# EAGLE board Iluminacion_LED (EAGLE 9.6.0)

Size 114.5 x 114.5 mm. Coordinates in mm from the lower left corner, seen from the top.
Outline: circle at 57.25,57.25 radius 50.25
Outline: circle at 57.25,57.25 radius 57.25
Copper layers (1*16): Top 0.035mm / dielectric 1.5mm / Bottom 0.035mm
Design rules "default": minimum track width 6mil, minimum drill 0.35mm, track to track 6mil, track to pad 6mil, pad to pad 6mil, via to via 6mil, smd to smd 6mil, copper to edge 40mil, drill to drill 6mil, minimum pad ring 10mil, minimum via ring 8mil, stop-mask expansion 4mil, vias tented up to drill 0mil, thermal gap 10mil

## Footprints (pad centres in the part's own frame; a part is rotated, then mirrored left to right if it is on the bottom)
LED5730-BLANCO = smd 2.3 x 1.8: 3 0,0 | smd 1.2 x 1.8: A -2.5,0; C 2.5,0
R0805 = smd 1.3 x 1.5: 1 -0.95,0; 2 0.95,0

## Placement (x,y rotation side)
LED1  [LED5730-BLANCO]  111,56.75 0 top
LED2  [LED5730-BLANCO]  110.18,66.08 10 top
LED3  [LED5730-BLANCO]  107.76,75.13 20 top
LED4  [LED5730-BLANCO]  103.8,83.62 30 top
LED5  [LED5730-BLANCO]  98.42,91.3 40 top
LED6  [LED5730-BLANCO]  91.8,97.92 50 top
LED7  [LED5730-BLANCO]  84.12,103.3 60 top
LED8  [LED5730-BLANCO]  75.63,107.26 70 top
LED9  [LED5730-BLANCO]  66.58,109.68 80 top
LED10  [LED5730-BLANCO]  20.42,65.64 0 top
LED11  [LED5730-BLANCO]  17.88,102.47 0 top
LED12  [LED5730-BLANCO]  12.8,65.64 0 top
LED13  [LED5730-BLANCO]  40.74,71.99 0 top
LED14  [LED5730-BLANCO]  33.12,71.99 0 top
LED15  [LED5730-BLANCO]  25.5,71.99 0 top
LED16  [LED5730-BLANCO]  17.88,71.99 0 top
LED17  [LED5730-BLANCO]  10.26,71.99 0 top
LED18  [LED5730-BLANCO]  40.74,77.07 0 top
LED19  [LED5730-BLANCO]  33.12,77.07 0 top
LED20  [LED5730-BLANCO]  25.5,77.07 0 top
LED21  [LED5730-BLANCO]  17.88,77.07 0 top
LED22  [LED5730-BLANCO]  10.26,77.07 0 top
LED23  [LED5730-BLANCO]  40.74,82.15 0 top
LED24  [LED5730-BLANCO]  33.12,82.15 0 top
LED25  [LED5730-BLANCO]  25.5,82.15 0 top
LED26  [LED5730-BLANCO]  17.88,82.15 0 top
LED27  [LED5730-BLANCO]  10.26,82.15 0 top
LED28  [LED5730-BLANCO]  40.74,87.23 0 top
LED29  [LED5730-BLANCO]  33.12,87.23 0 top
LED30  [LED5730-BLANCO]  25.5,87.23 0 top
LED31  [LED5730-BLANCO]  17.88,87.23 0 top
LED32  [LED5730-BLANCO]  10.26,87.23 0 top
LED33  [LED5730-BLANCO]  40.74,92.31 0 top
LED34  [LED5730-BLANCO]  33.12,92.31 0 top
LED35  [LED5730-BLANCO]  25.5,92.31 0 top
LED36  [LED5730-BLANCO]  17.88,92.31 0 top
R1  1k  [R0805]  31.85,60.56 0 top
R2  1k  [R0805]  26.77,60.56 0 top
R3  1k  [R0805]  21.69,60.56 0 top
R4  1k  [R0805]  16.61,60.56 0 top
R5  1k  [R0805]  11.53,60.56 0 top
R6  1k  [R0805]  6.45,60.56 0 top
R7  1k  [R0805]  42.01,66.91 0 top
R8  1k  [R0805]  36.93,66.91 0 top
R9  1k  [R0805]  31.85,66.91 0 top
R10  1k  [R0805]  42.01,60.56 0 top
R11  1k  [R0805]  26.77,66.91 0 top
R12  1k  [R0805]  36.93,60.56 0 top

## Library data of the parts
LED1-LED36 = CaliBeta-Diodos
R1-R12 = CaliBeta-RCL

## Nets
+12V: R1.1 R3.1 R6.1 R8.1 R10.1 R12.1
GND: LED7.C LED8.C LED9.C LED10.C LED11.C LED12.C LED13.C LED14.C LED15.C LED16.C LED17.C LED18.C LED19.C LED20.C LED21.C LED22.C LED23.C LED24.C
N$1: LED22.A LED23.A LED24.A R9.2
N$2: LED16.A LED17.A LED18.A R2.2
N$3: LED1.A LED2.A LED3.A R1.2
N$4: LED4.A LED5.A LED6.A R3.2
N$5: LED19.A LED20.A LED21.A R4.2
N$6: LED25.A LED26.A LED27.A R6.2
N$7: LED7.A LED8.A LED9.A R5.2
N$8: LED10.A LED11.A LED12.A R7.2
N$9: LED28.A LED29.A LED30.A R8.2
N$10: LED34.A LED35.A LED36.A R10.2
N$11: LED13.A LED14.A LED15.A R11.2
N$12: LED31.A LED32.A LED33.A R12.2
N$15: R11.1
X1: LED1.C LED2.C LED3.C LED4.C LED5.C LED6.C LED34.C LED35.C LED36.C R2.1 R4.1 R9.1
Y1: LED25.C LED26.C LED27.C LED28.C LED29.C LED30.C LED31.C LED32.C LED33.C R5.1 R7.1

## Tracks (layer width: path | path; a pad name or v marks a point on that pad's centre or on a via)
+12V  (5 unrouted)
GND  (17 unrouted)
N$1  (3 unrouted)
N$2  (3 unrouted)
N$3  (3 unrouted)
N$4  (3 unrouted)
N$5  (3 unrouted)
N$6  (3 unrouted)
N$7  (3 unrouted)
N$8  (3 unrouted)
N$9  (3 unrouted)
N$10  (3 unrouted)
N$11  (3 unrouted)
N$12  (3 unrouted)
X1  (11 unrouted)
Y1  (10 unrouted)